# Altium PCB D_amp_PCB.PcbDoc (part 3 of 3)
Units mm, origin at the board's own origin, x right, y up, seen from the top; angles counter-clockwise.
Board outline 73 x 55 mm, 2 copper layers (Top Layer, Bottom Layer), stack 1.535 mm thick; 54 components, 29 nets, 139 pads, 325 vias.
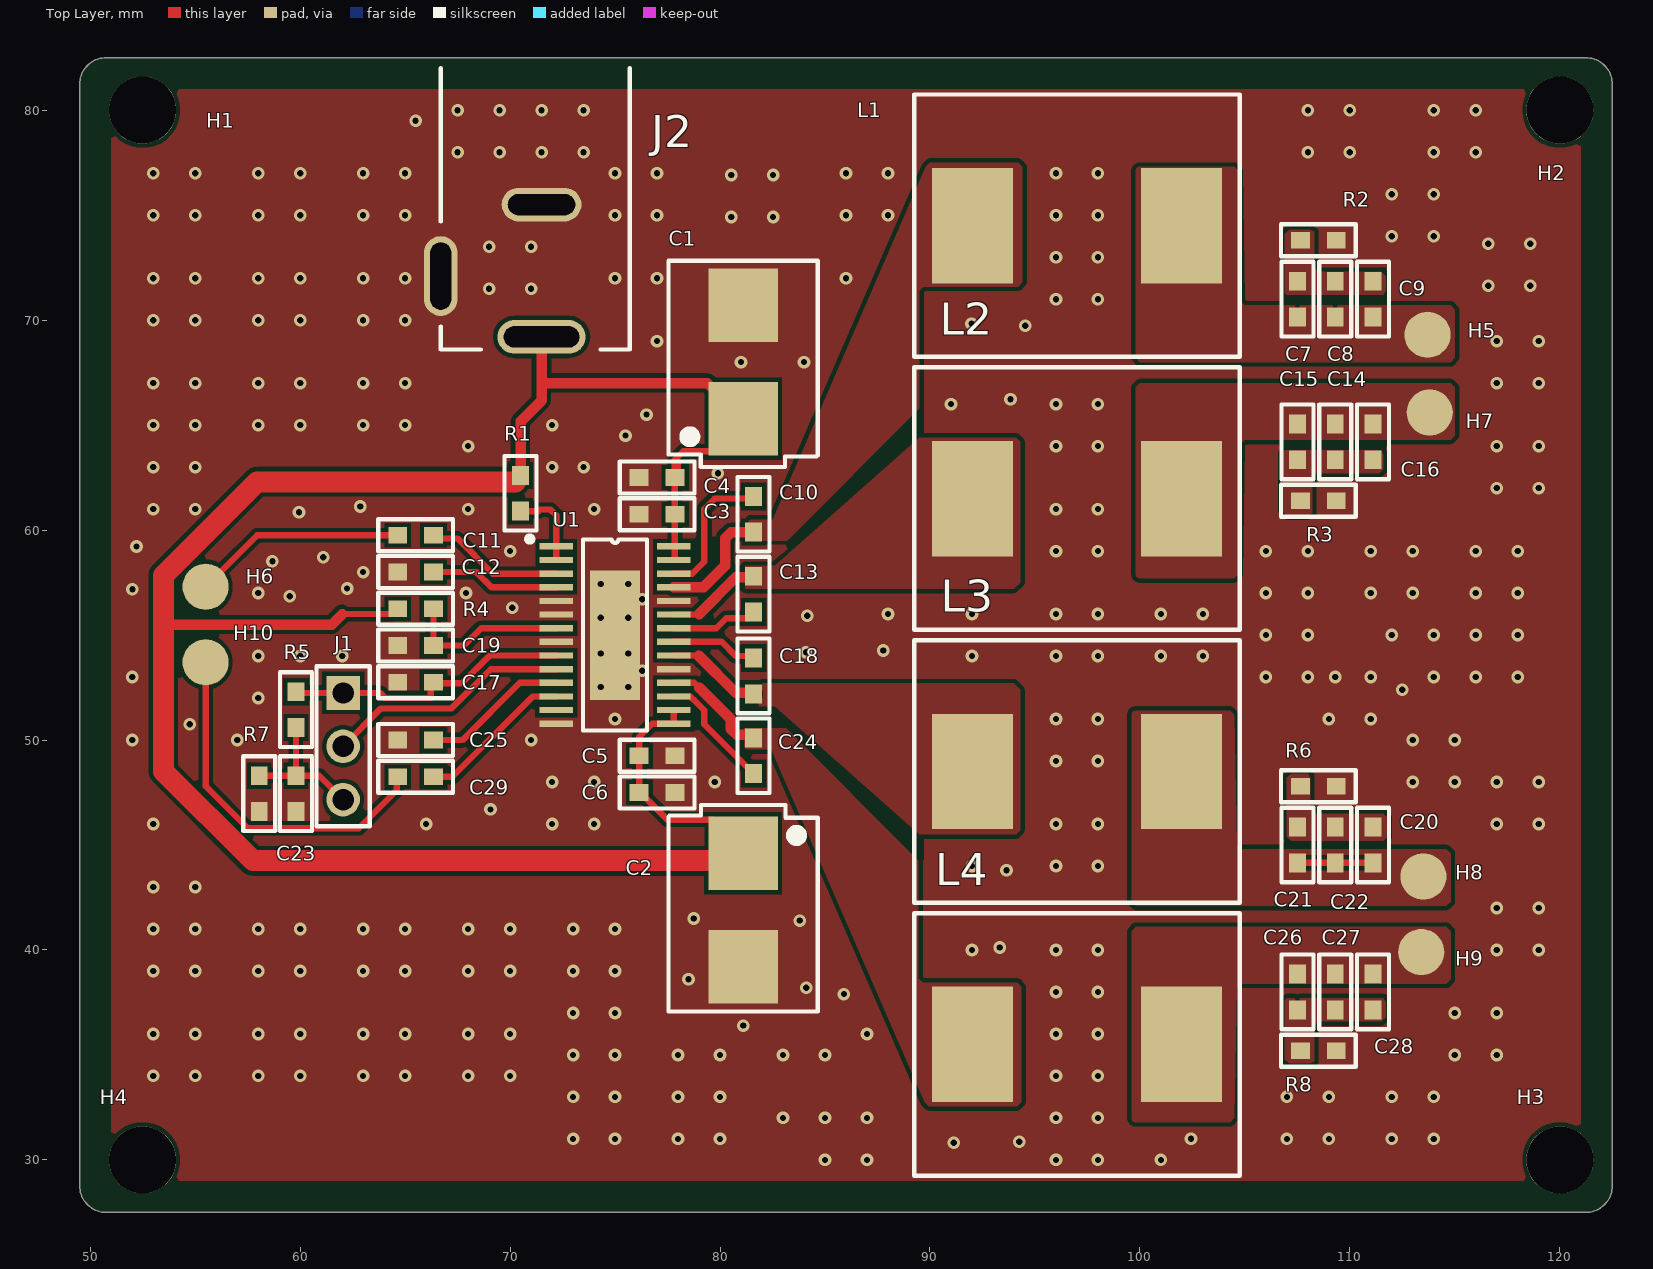
[diagram p0: Top Layer view]

## Part data (continued)
U1: "Audio Amp Speaker 2-CH Stereo 15W Class-D 28-Pin HTSSOP EP Tube", Case/Package="HTSSOP EP", Manufacturer="Texas Instruments", Manufacturer Lifecycle Status=ACTIVE, Max Operating Temperature=85°C, Max Output Power=15W, Max Power Dissipation=4.48W, Max Supply Voltage=26V, Min Operating Temperature=-40°C, Min Supply Voltage=8V, Nominal Supply Current=32mA, Operating Supply Voltage=15V, Voltage Gain=36dB, Category="Amplifiers - Audio", ComponentLink1Description=https://sigma.octopart.com:443/149651771/technical_drawing/Texas-Instruments-TPA3110D2PWP.pdf?src-supplier=Texas+Instruments, ComponentLink1URL=https://sigma.octopart.com:443/149651771/technical_drawing/Texas-Instruments-TPA3110D2PWP.pdf?src-supplier=Texas+Instruments, ComponentLink2Description=https://octopart.com:443/opatz8j6/c1?t=9VHQkCeyPoh3DPMAEO_DFo9LJb0sepxuhZqDcO3kNn-hr1I6CpSxn9kX-i7iwNW1QQ_FN3-6OiNrwOctxpZjiE5mK9kpTyXxb_K8QBkQ4FiC-fcvIhxPQqWrd8GZ9PALWuLWiXKfwAYsJ8ZGWNDJfECj5kWpDTYvS6oUPIgRtk3L4fHRzyDudR_Z5pmWaveG_BBIkZ83n_fZiEsPkwTBlDf9yGPm6kI-UHfL6X43OizeKqBVu1YbbkNF2nnE8vpO5NbVv8XYB0cGXcHluYXKMHSHWR7DfumS5WPtGaQJ0waGYKYvuduurNqcQleWD3Djxar4CBCeupFhl3JUWnQgj2JyMxpHzweSWShAO39dpy6sbNmcTfY9s9cWmFe3EZSCp8Jg4c5Xzw&src-supplier=Texas+Instruments, ComponentLink2URL=https://octopart.com:443/opatz8j6/c1?t=9VHQkCeyPoh3DPMAEO_DFo9LJb0sepxuhZqDcO3kNn-hr1I6CpSxn9kX-i7iwNW1QQ_FN3-6OiNrwOctxpZjiE5mK9kpTyXxb_K8QBkQ4FiC-fcvIhxPQqWrd8GZ9PALWuLWiXKfwAYsJ8ZGWNDJfECj5kWpDTYvS6oUPIgRtk3L4fHRzyDudR_Z5pmWaveG_BBIkZ83n_fZiEsPkwTBlDf9yGPm6kI-UHfL6X43OizeKqBVu1YbbkNF2nnE8vpO5NbVv8XYB0cGXcHluYXKMHSHWR7DfumS5WPtGaQJ0waGYKYvuduurNqcQleWD3Djxar4CBCeupFhl3JUWnQgj2JyMxpHzweSWShAO39dpy6sbNmcTfY9s9cWmFe3EZSCp8Jg4c5Xzw&src-supplier=Texas+Instruments, ComponentLink3Description=https://datasheet.octopart.com:443/TPA3110D2PWP-Texas-Instruments-datasheet-11515068.pdf?src-supplier=Texas+Instruments, ComponentLink3URL=https://datasheet.octopart.com:443/TPA3110D2PWP-Texas-Instruments-datasheet-11515068.pdf?src-supplier=Texas+Instruments, ComponentLink4Description=https://datasheet.octopart.com:443/TPA3110D2PWP-Texas-Instruments-datasheet-10288525.pdf?src-supplier=Texas+Instruments, ComponentLink4URL=https://datasheet.octopart.com:443/TPA3110D2PWP-Texas-Instruments-datasheet-10288525.pdf?src-supplier=Texas+Instruments, ComponentLink5Description=https://sigma.octopart.com:443/49250896/technical_drawing/Texas-Instruments-TPA3110D2PWP.pdf?src-supplier=Texas+Instruments, ComponentLink5URL=https://sigma.octopart.com:443/49250896/technical_drawing/Texas-Instruments-TPA3110D2PWP.pdf?src-supplier=Texas+Instruments, ComponentLink6Description=https://datasheet.octopart.com:443/TPA3110D2PWP-Texas-Instruments-datasheet-37738469.pdf?src-supplier=element14+APAC, ComponentLink6URL=https://datasheet.octopart.com:443/TPA3110D2PWP-Texas-Instruments-datasheet-37738469.pdf?src-supplier=element14+APAC, ComponentLink7Description=https://datasheet.octopart.com:443/TPA3110D2PWP-Texas-Instruments-datasheet-159117886.pdf?src-supplier=EBEE, ComponentLink7URL=https://datasheet.octopart.com:443/TPA3110D2PWP-Texas-Instruments-datasheet-159117886.pdf?src-supplier=EBEE, ComponentLink8Description=https://datasheet.octopart.com:443/TPA3110D2PWP-Texas-Instruments-datasheet-102499862.pdf?src-supplier=Newark, ComponentLink8URL=https://datasheet.octopart.com:443/TPA3110D2PWP-Texas-Instruments-datasheet-102499862.pdf?src-supplier=Newark, ComponentLink9Description=https://datasheet.octopart.com:443/TPA3110D2PWP-Texas-Instruments-datasheet-33012572.pdf?src-supplier=Newark, ComponentLink9URL=https://datasheet.octopart.com:443/TPA3110D2PWP-Texas-Instruments-datasheet-33012572.pdf?src-supplier=Newark, ComponentLink10Description=https://datasheet.octopart.com:443/TPA3110D2PWP-Texas-Instruments-datasheet-14135493.pdf?src-supplier=iiiC, ComponentLink10URL=https://datasheet.octopart.com:443/TPA3110D2PWP-Texas-Instruments-datasheet-14135493.pdf?src-supplier=iiiC, ComponentLink11Description=https://datasheet.octopart.com:443/TPA3110D2PWP-Texas-Instruments-datasheet-10979497.pdf?src-supplier=Farnell, ComponentLink11URL=https://datasheet.octopart.com:443/TPA3110D2PWP-Texas-Instruments-datasheet-10979497.pdf?src-supplier=Farnell, ComponentLink12Description=https://datasheet.octopart.com:443/TPA3110D2PWP-Texas-Instruments-datasheet-8360863.pdf?src-supplier=Farnell, ComponentLink12URL=https://datasheet.octopart.com:443/TPA3110D2PWP-Texas-Instruments-datasheet-8360863.pdf?src-supplier=Farnell, ComponentLink13Description=http://sigma.octopart.com:80/reach_statement/Texas-Instruments-company-64.pdf?src-supplier=Compliance+Statements, ComponentLink13URL=http://sigma.octopart.com:80/reach_statement/Texas-Instruments-company-64.pdf?src-supplier=Compliance+Statements, ComponentLink14Description=http://sigma.octopart.com:80/conflict_mineral_statement/Texas-Instruments-company-63.pdf?src-supplier=Compliance+Statements, ComponentLink14URL=http://sigma.octopart.com:80/conflict_mineral_statement/Texas-Instruments-company-63.pdf?src-supplier=Compliance+Statements, Contact Plating=Gold, Gain=36dB, Height=1.2mm, Lead Free="Lead Free", Length=9.7mm, Lifecycle Status=Production, Load Impedance=4Ω, Manufacturer Part Number=TPA3110D2PWP, Number of Channels=2, Output Power=15W, Pins=28, Power Dissipation=4.48W, Pricing="50=1,5401, 100=1,4378, 250=1,3687 (USD)", Radiation Hardening=No, REACH SVHC=No, RoHS=Compliant, Schedule B="8542330000, 8542330000|8542330000|8542330000|8542330000|8542330000", Stock=250, Supplier="Arrow Electronics", Supplier Part Number=TPA3110D2PWP, Supply Type=Single, Thickness=1mm, Width=4.4mm

## Via types
v1: diameter 0.6, hole 0.3, Top Layer to Bottom Layer, 317 vias
v2: diameter 0.6, hole 0.3, Top Layer to Bottom Layer, tented top, 8 vias

## Nets (pads, with @x,y where several pads share a name; then routed paths per layer and width w, separated by ;. In a path a pad name is that pad's centre, name@x,y a point inside that pad or via, vN(x,y) a via of type N, cw(c..) or ccw(c..) an arc to the next point about the centre after c; other vN are vias at no path point)
+16: C1.1@81.1,65.3 C2.1@81.1,44.6 C3.2 C4.2 C5.2 C6.2 J2.1 R1.2 R4.1 U1.15 U1.16 U1.27 U1.28 | length 107.5
  Top Layer w0.3: 62,56 64.4,56 R4.1 ; U1.16 U1.15 76.775,50.775 76.15,50.15 C5.2 C6.2 76.2,47.5 77.5,46.2 79.6,46.2 81.1,44.7 81.1,44.6 C2.1@80.75,44.25 ; U1.27 77.85,58.575 C3.2 C4.2 ; 78,63.25 78,62.65 C4.2 ; C1.1@81.1,65.3 81.1,65.25 79.6,63.75 78.25,63.75 77.85,63.35 C4.2
  Top Layer w0.5: 53.5,55.5 61.5,55.5 62,56 ; R1.2@70.5,62.55 70.5,65.171 71.5,66.171 J2.1 ; 71.5,67 79.4,67 79.6,66.8 79.7,66.8 81.1,65.4 C1.1@81.1,65.3
  Top Layer w1: R1.2@70.25,62.3 57.954,62.3 53.5,57.846 53.5,55.5 53.5,48.5 57.75,44.25 C2.1@80.75,44.25
GND: C1.2@81.1,70.7 C2.2@81.1,39.2 C3.1 C4.1 C5.1 C6.1 C12.1 C17.1 C19.1 C23.1 C25.1 J2.2 J2.3 R2.1 R3.2 R6.1 R7.1 R8.2 U1.5 U1.6 U1.8 U1.14 U1.19 U1.24 U1.29
  other v1: 85,30 87,30 96,30 98,30 101,30 91.13,30.814 94.245,30.864 73,31 75,31 78,31 80,31 107,31 109,31 112,31 114,31 102.434,31.015 83,32 85,32 87,32 96,32 98,32 73,33 75,33 78,33 80,33 107,33 109,33 112,33 114,33 53,34 55,34 58,34 60,34 63,34 65,34 68,34 70,34 96,34 98,34 73,35 75,35 78,35 80,35 83,35 85,35 115,35 117,35 53,36 55,36 58,36 60,36 63,36 65,36 68,36 70,36 87,36 96,36 98,36 81.1,36.4 73,37 75,37 115,37 117,37 85.9,37.9 96,38 98,38 84.1,38.2 78.5,38.6 53,39 55,39 58,39 60,39 63,39 65,39 68,39 70,39 73,39 75,39 92,40 96,40 98,40 117,40 119,40 93.317,40.117 53,41 55,41 58,41 60,41 63,41 65,41 68,41 70,41 73,41 75,41 83.8,41.4 78.75,41.5 117,42 119,42 53,43 55,43 93.647,43.801 92,44 96,44 98,44 53,46 66,46 72,46 74,46 96,46 98,46 117,46 119,46 69.067,46.693 72,48 74,48 79.75,48 113,48 115,48 117,48 119,48 96,49 98,49 52,50 57,50 71,50 113,50 115,50 54.75,50.75 75,51 96,51 98,51 109,51 111,51 58,52 112.5,52.4 52,53 106,53 108,53 109.3,53 111,53 114,53 116,53 118,53 76.3,53.3 58,54 60,54 62,54 92,54 96,54 98,54 101,54 103,54 84.092,54.179 87.772,54.265 106,55 108,55 112,55 114,55 116,55 118,55 84.149,55.92 88,56 92,56 96,56 98,56 101,56 103,56 70.1,56.3 76.3,56.7 59.509,56.853 58,57 67.9,57 106,57 108,57 111,57 113,57 116,57 118,57 52.012,57.175 62.236,57.217 63,58 58.68,58.51 61.104,58.712 70,59 96,59 98,59 106,59 108,59 111,59 113,59 116,59 118,59 52.207,59.217 59.947,60.847 53,61 55,61 68,61 74,61 96,61 98,61 62.869,61.122 117,62 119,62 79.9,62.7 53,63 55,63 72,63 73.5,63 68,64 96,64 98,64 117,64 119,64 75.5,64.5 53,65 55,65 58,65 60,65 63,65 65,65 72,65 76.5,65.5 91,66 96,66 98,66 93.833,66.229 53,67 55,67 58,67 60,67 63,67 65,67 117,67 119,67 81,68 84,68 77,69 117,69 119,69 94.54,69.734 91.979,69.835 53,70 55,70 58,70 60,70 63,70 65,70 96,71 98,71 69,71.5 71,71.5 116.593,71.639 118.593,71.639 53,72 55,72 58,72 60,72 63,72 65,72 75,72 77,72 86,72 96,73 98,73 69,73.5 71,73.5 116.593,73.639 118.593,73.639 112,74 114,74 80.528,74.912 82.528,74.912 53,75 55,75 58,75 60,75 63,75 65,75 75,75 77,75 86,75 88,75 96,75 98,75 112,76 114,76 80.528,76.912 82.528,76.912 53,77 55,77 58,77 60,77 63,77 65,77 75,77 77,77 86,77 88,77 96,77 98,77 67.5,78 69.5,78 71.5,78 73.5,78 108,78 110,78 114,78 116,78 65.5,79.5 67.5,80 69.5,80 71.5,80 73.5,80 108,80 110,80 114,80 116,80
  other v2: 74.325,52.525 75.625,52.525 74.325,54.125 75.625,54.125 74.325,55.827 75.625,55.827 74.325,57.427 75.625,57.427
LINP: C11.1 H6.1 | length 10.2
  Top Layer w0.3: H6.1 57.95,59.75 C11.1
NetC7_1: C7.1 C8.1 C9.2 R2.2
NetC10_1: C10.1 U1.26 | length 6.8
  Top Layer w0.3: U1.26 78.675,57.925 79.25,58.5 79.25,61 79.75,61.5 81.5,61.5 C10.1
NetC11_2: C11.2 U1.3 | length 6.6
  Top Layer w0.3: C11.2 66.5,59.6 67.5,59.6 69.175,57.925 U1.3
NetC12_2: C12.2 U1.4 | length 6.2
  Top Layer w0.3: C12.2 68.393,58 69.118,57.275 U1.4
NetC13_1: C13.1 U1.22 | length 4.2
  Top Layer w0.3: U1.22 79.825,55.325 80.3,55.8 81.35,55.8 81.6,56.05 C13.1
NetC14_2: C14.2 C15.2 C16.1 R3.1
NetC17_2: C17.2 J1.1 R5.1 U1.9 | length 13.8
  Top Layer w0.3: R5.1 59.86,52.24 J1.1 63.815,52.24 64.055,52 66.224,52 66.224,52.624 C17.2 66.4,52.7 67.7,52.7 69.025,54.025 U1.9
NetC18_1: C18.1 U1.21 | length 4.1
  Top Layer w0.3: U1.21 80.075,54.675 80.75,54 81.5,54 C18.1
NetC19_2: C19.2 R4.2 U1.7 | length 7.9
  Top Layer w0.3: R4.2 C19.2 67.8,54.5 68.625,55.325 U1.7
NetC20_1: C20.1 C21.1 C22.2 R6.2
NetC23_2: C23.2 J1.3 R5.2 R7.2 | length 6.8
  Top Layer w0.3: R7.2 C23.2 ; R5.2 C23.2 ; J1.3 60.91,48.3 C23.2
NetC24_1: C24.1 U1.17 | length 6.4
  Top Layer w0.3: U1.17@78.45,52.075 U1.17 78.576,52.075 78.726,51.925 78.745,51.925 79.25,51.42 79.25,50.75 81.3,48.7 81.35,48.7 81.6,48.45 C24.1
NetC25_2: C25.2 U1.11 | length 7
  Top Layer w0.3: C25.2 67.738,50 70.463,52.725 U1.11
NetC26_2: C26.2 C27.2 C28.1 R8.1 | length 0
NetC29_2: C29.2 U1.12 | length 7.4
  Top Layer w0.3: C29.2 67.25,48.25 71.075,52.075 U1.12
NetJ1_2: J1.2 U1.10 | length 11.7
  Top Layer w0.3: J1.2 63.85,51.5 67.207,51.5 69.082,53.375 U1.10
NetR1_1: R1.1 U1.1 U1.2 | length 4
  Top Layer w0.3: R1.1 71.35,60.9 71.426,60.976 71.924,60.976 72.2,60.7 U1.1 U1.2
OUTNL: C13.2 L2.1@92.025,61.5 U1.23 | length 4.6
  Top Layer w0.3: U1.23 78.975,55.975 79,56
  Top Layer w0.5: 79,56 80.75,57.75 81.55,57.75 C13.2
OUTNL1: C14.1 C15.1 C16.2 H7.1 L2.2@101.975,61.5
OUTNR: C18.2 L3.1@92.025,48.5 U1.20 | length 4.6
  Top Layer w0.3: U1.20 78.975,54.025
  Top Layer w0.5: 78.975,54.025 80.75,52.25 81.55,52.25 C18.2
OUTNR1: C20.2 C21.2 C22.1 H8.1 L3.2@101.975,48.5 | length 3.6
  Top Layer w0.3: C21.2 C22.1 C20.2
OUTPL: C10.2 L1.1@92.025,74.5 U1.25 | length 6.1
  Top Layer w0.3: C10.2@81.35,59.65 C10.2 C10.2@81.6,59.85
  Top Layer w0.5: U1.25 79.214,57.275 80.25,58.311 80.25,59.607 80.543,59.9 C10.2
OUTPL1: C7.2 C8.2 C9.1 H5.1 L1.2@101.975,74.5 | length 0
OUTPR: C24.2 L4.1@92.025,35.5 U1.18 | length 5.2
  Top Layer w0.3: U1.18 78.775,52.725 79,52.5
  Top Layer w0.5: 79,52.5 79.018,52.5 80.5,51.018 80.5,50.543 80.793,50.25 81.45,50.25 C24.2
OUTPR1: C26.1 C27.1 C28.2 H9.1 L4.2@101.975,35.5 | length 0
RINP: C29.1 H10.1 | length 17.2
  Top Layer w0.3: H10.1 55.5,47.805 57.505,45.8 62.8,45.8 64.6,47.6 64.6,48.2 C29.1
pads on no net: C1.1@81.1,65.3 C1.2@81.1,70.7 C2.1@81.1,44.6 C2.2@81.1,39.2 H1.1 H2.1 H3.1 H4.1 L1.1@92.025,74.5 L1.2@101.975,74.5 L2.1@92.025,61.5 L2.2@101.975,61.5 L3.1@92.025,48.5 L3.2@101.975,48.5 L4.1@92.025,35.5 L4.2@101.975,35.5 U1.13

## Polygon pours and split planes (outlines as drawn)
GND on Top Layer "GND_L01_P016" (solid, pour order 16): 51,81 51,29 121,29 121,81
OUTNR on Top Layer "OUTNR_L01_P003" (solid, pour order 3): 81.2,51.6 82.6,51.6 89.5,45.5 94.1,45.5 94.3,45.7 94.3,52.4 94,52.7 81.2,52.7
NetC7_1 on Top Layer "NETC7_1_L01_P013" (solid, pour order 13): 107,71.2 106.9,71.3 106.9,74.1 107.1,74.3 108.1,74.3 108.3,74.2 108.3,72.5 108.5,72.3 111.5,72.3 111.7,72.1 111.7,71.4 111.6,71.2
NetC26_2 on Top Layer "NETC26_2_L01_P011" (solid, pour order 11): 107,37.7 106.9,37.6 106.9,34.8 107.1,34.6 108.1,34.6 108.3,34.7 108.3,36.4 108.5,36.6 111.5,36.6 111.7,36.8 111.7,37.5 111.6,37.7
NetC14_2 on Top Layer "NETC14_2_L01_P012" (solid, pour order 12): 106.9,63.8 106.8,63.7 106.8,60.9 107,60.7 108,60.7 108.2,60.8 108.2,62.5 108.4,62.7 111.4,62.7 111.6,62.9 111.6,63.6 111.5,63.8
OUTNL1 on Top Layer "OUTNL1_L01_P006" (solid, pour order 6): 100,57.7 cw(c100,57.9) 99.8,57.9 99.8,66.8 100,67 114.8,67 115,66.8 115,64.5 114.8,64.3 105,64.3 104.8,64.1 104.7,57.9 104.5,57.7 100,57.7
NetC20_1 on Top Layer "NETC20_1_L01_P010" (solid, pour order 10): 107.2,48.4 107,48.2 107,45.4 107.2,45.2 111.6,45.2 111.8,45.4 111.8,46.3 111.6,46.5 108.4,46.5 108.1,46.7 108.1,48.2 108,48.4
OUTPR1 on Top Layer "OUTPR1_L01_P008" (solid, pour order 8): 99.8,31.8 cw(c99.8,32) 99.6,32 99.6,40.9 99.8,41.1 114.6,41.1 114.8,40.9 114.8,38.6 114.6,38.4 104.8,38.4 104.6,38.2 104.5,32 104.3,31.8 99.8,31.8
OUTNR1 on Top Layer "OUTNR1_L01_P007" (solid, pour order 7): 99.8,51.4 ccw(c99.8,51.2) 99.6,51.2 99.6,42.3 99.8,42.1 114.6,42.1 114.8,42.3 114.8,44.6 114.6,44.8 104.8,44.8 104.6,45 104.5,51.2 104.3,51.4 99.8,51.4
OUTPL1 on Top Layer "OUTPL1_L01_P005" (solid, pour order 5): 100,77.3 ccw(c100,77.1) 99.8,77.1 99.8,68.2 100,68 114.8,68 115,68.2 115,70.5 114.8,70.7 105,70.7 104.8,70.9 104.7,77.1 104.5,77.3 100,77.3
OUTPR on Top Layer "OUTPR_L01_P004" (solid, pour order 4): 81.15,50.55 83.15,50.55 89.45,44.25 89.45,38.65 89.65,38.45 94.15,38.45 94.35,38.25 94.35,32.75 94.15,32.55 89.95,32.55 89.75,32.75 82.45,49.55 81.25,49.55 81.15,49.65
OUTPL on Top Layer "OUTPL_L01_P002" (solid, pour order 2): 81.2,59.5 83.2,59.5 89.5,65.8 89.5,71.4 89.7,71.6 94.2,71.6 94.4,71.8 94.4,77.3 94.2,77.5 90,77.5 89.8,77.3 82.5,60.5 81.3,60.5 81.2,60.4
OUTNL on Top Layer "OUTNL_L01_P001" (solid, pour order 1): 81.2,58.3 82.6,58.3 89.5,64.4 94.1,64.4 94.3,64.2 94.3,57.5 94,57.2 81.2,57.2
GND on Bottom Layer "GND_L02_P014" (solid, pour order 14): 51,81 51,29 121,29 121,81

## Other copper
Top Layer:
  pour cut-out: 89.654,44.25 89.7,44.296 89.7,45.3 89.47,45.3 89.409,45.361 89.339,45.361 87.6,47.1 87.4,47.1 85.791,48.709 85.562,48.709 85.562,48.701 85.425,48.564 89.654,44.334
  pour cut-out: 89.704,65.8 89.7,65.796 89.7,64.6 89.412,64.6 85.24,60.428 84.699,60.428 84.699,60.437 84.562,60.574 89.688,65.7 89.688,65.722

## Silkscreen, mask and mechanical layers (free items; w line width, h text height)
Mechanical 1:
  lines w0.2: 49.5,28.77 ccw(c50.77,28.77) 50.77,27.5 121.23,27.5 ccw(c121.23,28.77) 122.5,28.77 122.5,81.23 ccw(c121.23,81.23) 121.23,82.5 55,82.5 50.77,82.5 ccw(c50.77,81.23) 49.5,81.23 49.5,28.77